# Altium PCB PCB2.PcbDoc
Units mm, origin at the board's own origin, x right, y up, seen from the top; angles counter-clockwise.
Board outline 67 x 30 mm, 2 copper layers (Top Layer, Bottom Layer); 26 components, 17 nets, 61 pads, 16 vias.
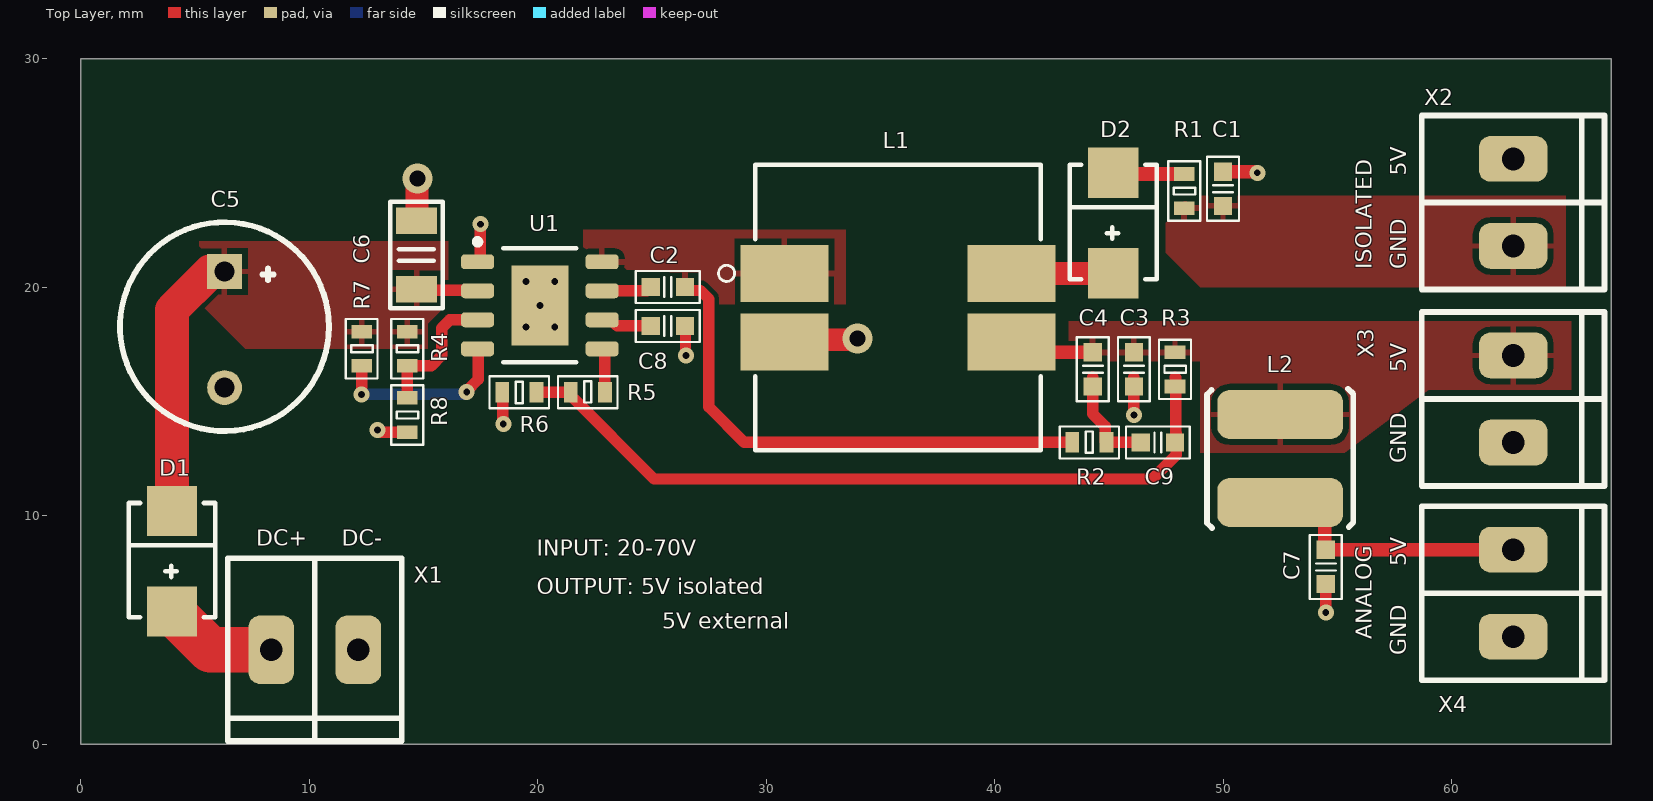
[diagram p0: Top Layer view]
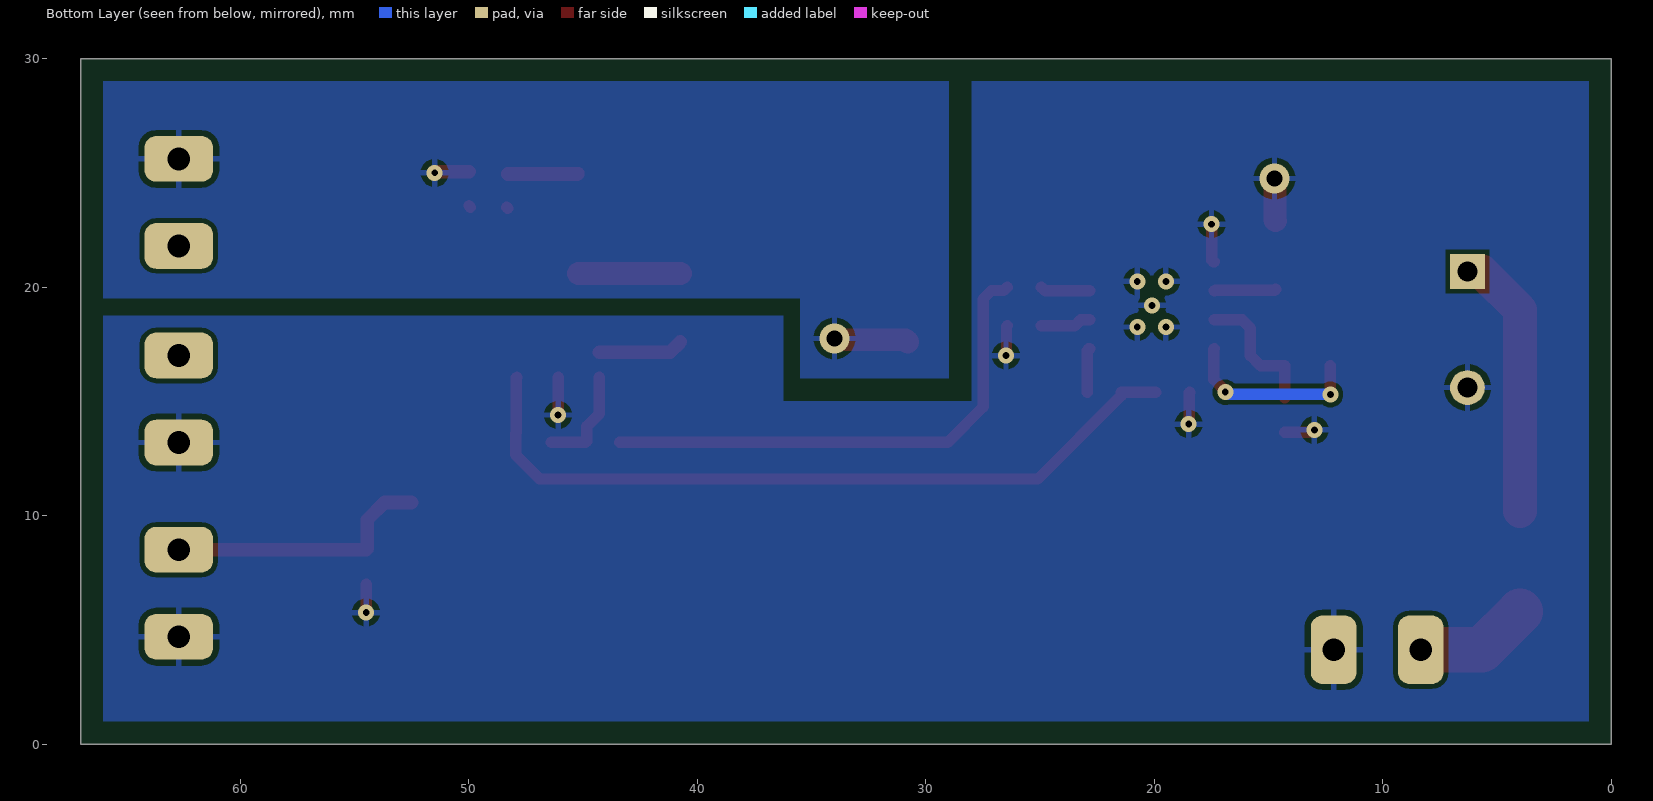
[diagram p1: Bottom Layer view, seen from below]
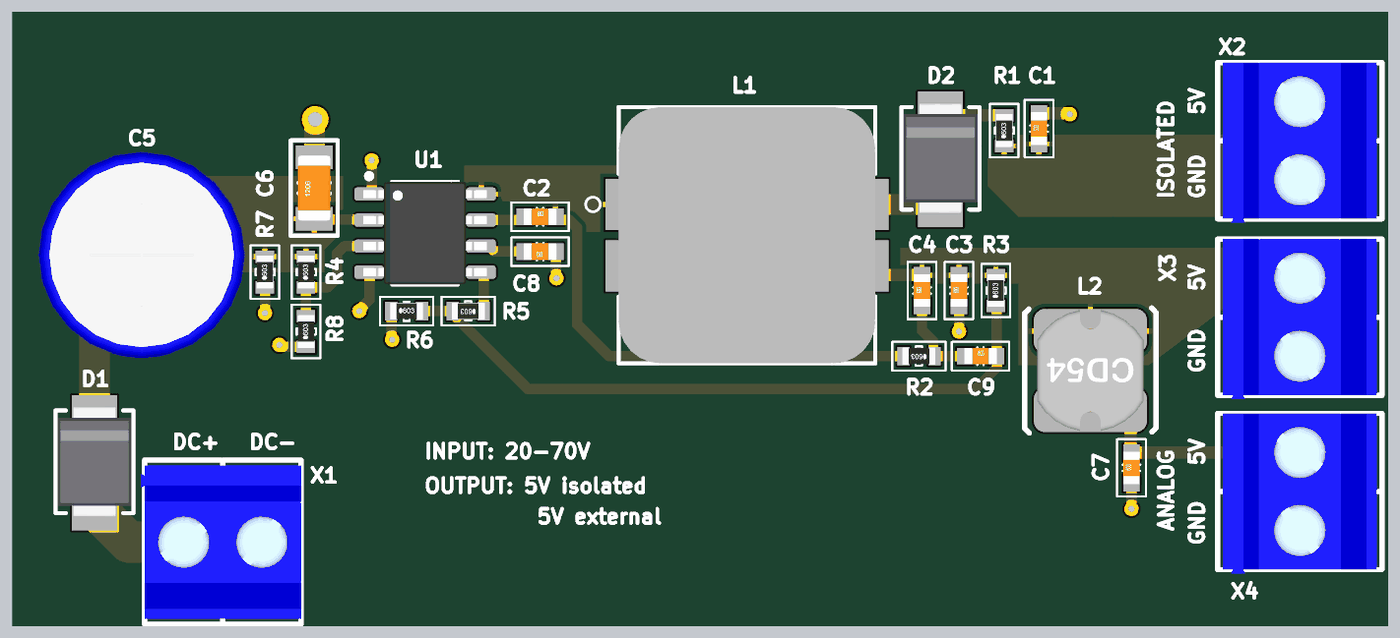
[diagram p2: 3D render of the assembled board from above, using the file's embedded part models]

## Layer stack, top to bottom
Top Solder: solder mask 0.0102, Solder Resist, Dk 3.5
Top Layer: signal copper 0.0356
Dielectric 1: dielectric 0.32, FR-4, Dk 4.8
Bottom Layer: signal copper 0.0356
Bottom Solder: solder mask 0.0102, Solder Resist, Dk 3.5

## Board outline
0,0 0,30 67,30 67,0

## Design rules (kind name [scope] priority, off if disabled: settings)
Clearance [All] p1: gap=0.2 ignorepadtopadclearanceinfootprint=FALSE except(0: SMDPad-Hole THPad-Hole Via-Hole Fill-Hole Poly-Hole Region-Hole Text-Hole)
HoleSize [All] p1: absolutevalues=TRUE maxlimit=3 minlimit=0.025 maxpercent=80.000 minpercent=20.000
HoleToHoleClearance [All] p1: gap=0.2 allowstackedmicrovias=TRUE
MinimumSolderMaskSliver [All] p1: minsoldermaskwidth=0.2
PolygonConnect [All] p1: connectstyle=Relief reliefconductorwidth=0.254 reliefentries=4 polygonreliefangle="90 Angle" airgapwidth=0.254
RoutingVias [All] p1: holewidth=0.3 width=0.7 viastyle="Through Hole" minholewidth=0.3 minwidth=0.7 maxholewidth=0.7 maxwidth=1.3
SilkToSilkClearance [All] p1: silktosilkclearance=0.2
SilkToSolderMaskClearance [IsPad] p1: minsilkscreentomaskgap=0.1 clearancetoexposedcopper=TRUE
SolderMaskExpansion [All] p1: expansion=0.102 istentingtop=FALSE
Width [All] p1: maxlimit=4 minlimit=0.2 preferedwidth=0.5 minimp=50.000000 maximp=50.000000 favimp=50.000000
25 further rules are at their usual default settings.

## Components (designator, comment, footprint, x,y, rotation, side; value= is the part's Value field where it differs from the comment)
C1 "22uF" C_0603 50,24.3 r90 top
C2 "0.1uF" C_0603 25.7,20 r0 top
C3 "22uF" C_0603 46.1,16.4 r90 top
C4 "3.3nF" C_0603 44.3,16.4 r90 top
C5 "10uF" CAP470X25V 6.3,18.14 r270 top
C6 "0.1uF" C_1206 14.7,21.4 r90 top
C7 "{Value}" C_0603 54.5,7.75 r90 top
C8 "2.2uF" C_0603 25.7,18.3 r180 top
C9 "1nF" C_0603 47.15,13.2 r0 top
D1 "10BQ100" DO-214AA 4,8 r270 top
D2 "10BQ100" DO-214AA 45.2,22.8 r270 top
L1 "DRQ127-330-R" XFMR_DRQ127-150-R 35.775,19.1 r0 top
L2 "{Value}" CD54NP 52.5,12.5 r180 top
R1 "0R" R_0603 48.3,24.2 r90 top
R2 "100k" R_0603 44.15,13.2 r180 top
R3 "95k3" R_0603 47.9,16.4 r90 top
R4 "75k" R_0603 14.3,17.3 r90 top
R5 "4k7" R_0603 22.2,15.4 r180 top
R6 "30k" R_0603 19.2,15.4 r0 top
R7 "165k" R_0603 12.3,17.3 r90 top
R8 "6k8" R_0603 14.3,14.4 r90 top
U1 "SCT2A22STER" ESOP-8 20.1,19.2 r0 top
X1 "DG340R-3.81-02P" 340-021-12 10.25,4.127 r0 top
X2 "DG340R-3.81-02P" 340-021-12 62.7,23.705 r90 top
X3 "DG340R-3.81-02P" 340-021-12 62.7,15.1 r90 top
X4 "DG340R-3.81-02P" 340-021-12 62.7,6.6 r90 top

## Footprints (in the part's own frame and the unit in brackets; to place one, negate y for a bottom-side part, rotate by r counter-clockwise, add the part's x,y. Pads: shape width x height; smd on the part's side, far side on the other; paste and mask are expansions set on the pad)
340-021-12 [mm]
  rrect50% 2x3 hole 1: 1(1.905,0) 2(-1.905,0)
  silkscreen extent -3.81,-4 3.81,4, body extent -4,-3.75 3.81,3.75, height 8.5
C_0603 [mm] "Chip Capacitor; Body 1.6 x 0.8 mm (LxW typ)"
  rect 0.8x0.8 smd: 1(-0.75,0) 2(0.75,0)
  silkscreen extent -1.4,-0.7 1.4,0.7, body extent -0.8,-0.4 0.8,0.4, height 0.3
C_1206 [mm]
  rect 1.15x1.8 smd: 1(-1.5,0) 2(1.5,0)
  silkscreen extent -2.32,-1.15 2.33,1.15, body extent -1.6,-0.8 1.6,0.8, height 1
CAP470X25V [mil]
  round 60 hole 35: 1(100,0)
  rect 60x60 hole 35: 2(-100,0)
  silkscreen extent -185,-180 175,180, body extent -198,-198 198,198, height 513
CD54NP [mm] "inductor"
  rrect50% 5.5x2.15 smd mask+0.102: 1(0,1.925) 2(0,-1.925)
  silkscreen extent -3.2,-3.05 3.2,3.05, body extent -2.6,-2.96 2.6,2.96, height 4.5
DO-214AA [mm]
  rect 2.2x2.2 smd: 1(2.2,0) 2(-2.2,0)
  silkscreen extent -2.55,-1.9 2.45,1.9, body extent -2.75,-1.8 2.65,1.8, height 2.3
ESOP-8 [mm] "with thermal pad"
  rrect50% 1.45x0.65 smd: 1(-2.725,1.905) 2(-2.725,0.635) 3(-2.725,-0.635) 4(-2.725,-1.905) 5(2.725,-1.905) 6(2.725,-0.635) 7(2.725,0.635) 8(2.725,1.905)
  rect 2.5x3.5 smd: 9(0,0)
  silkscreen extent -2.85,-2.5 1.6,2.9, body extent -3,-2.5 3,2.5, height 1.55
R_0603 [mm]
  rect 0.6x0.9 smd: 1(-0.75,0) 2(0.75,0)
  silkscreen extent -1.3,-0.7 1.3,0.7, body extent -0.8,-0.41 0.8,0.41, height 0.45
XFMR_DRQ127-150-R [mm]
  rect 3.85x2.5 smd: 1(-4.975,1.5) 2(-4.975,-1.5) 3(4.975,-1.5) 4(4.975,1.5)
  silkscreen extent -7.85,-6.25 6.25,6.25, body extent -6.25,-6.25 6.25,6.25, height 8

## Part data
C1 C3: library part C0603, "Capacitor", Part Number=CC0603MRX5R6BB226, Alternative Part=CC0603MRX6S5BB226
C2: library part C0603, "Capacitor", Part Number=CC0603KRX7R9BB104, Alternative Part=CC0603MRY5V9BB104
C4: library part C0603, "Capacitor", Part Number=CC0603KRX7R9BB332, Alternative Part=CC0603JRX7R9BB332
C5: library part C_10_12_5mm, "Capacitor", Part Number=SH160M0010B5S-1012, Alternative Part=-
C6: library part C1206, "Capacitor", Part Number=CC1206KKX7R0BB104, Alternative Part=CC1206JKX7R0BB104
C7: library part C0603, "Capacitor", Part Number=-, Alternative Part=-
C8: library part C0603, "Capacitor", Part Number=CC0603KRX5R8BB225, Alternative Part=-
C9: library part C0603, "Capacitor", Part Number=CC0603KRX7R9BB102, Alternative Part=CC0603KRX7R8BB102
D1 D2: library part D_DO-214AA, "Diode", Alternative Part=VS-10BQ100, Part Number=10BQ100
L1: library part DRQ127-150-R, "Inductor Power Shielded", Package=None, Alternative Part=-, Availability=Unavailable, Part Number=DRQ127-330-R, Price=None
L2: library part L_CD54NP, "Inductor", Part Number=-, Alternative Part=-
R1: library part R0603, "Resistor", Part Number=RC0603JR-070RL, Alternative Part=RC0603JR-100RL
R2: library part R0603, "Resistor", Part Number=RC0603FR-07100KL, Alternative Part=RC0603JR-07100KL
R3: library part R0603, "Resistor", Part Number=RC0603FR-0795K3L, Alternative Part=-
R4: library part R0603, "Resistor", Part Number=RC0603JR-0775KL, Alternative Part=RC0603FR-0775KL
R5: library part R0603, "Resistor", Part Number=RC0603FR-074K7L, Alternative Part=RC0603JR-074K7L
R6: library part R0603, "Resistor", Part Number=RC0603FR-0730KL, Alternative Part=RC0603JR-0730KL
R7: library part R0603, "Resistor", Part Number=RC0603FR-07165KL, Alternative Part=-
R8: library part R0603, "Resistor", Part Number=RC0603FR-076K8L, Alternative Part=RC0603JR-076K8L
U1: "Buck dc/dc", Alternative Part=-, Part Number=SCT2A22STER
X1 X2 X3 X4: "Connectors", Alternative Part=KLS2-340-3.81-02P-2S, Part Number=DG340R-3.81-02P, Type=DG340R-3.81-02P

## Via types
v1: diameter 0.7, hole 0.3, Top Layer to Bottom Layer, 14 vias
v2: diameter 1.3, hole 0.7, Top Layer to Bottom Layer, 2 vias

## Nets (pads, with @x,y where several pads share a name; then routed paths per layer and width w, separated by ;. In a path a pad name is that pad's centre, name@x,y a point inside that pad or via, vN(x,y) a via of type N, cw(c..) or ccw(c..) an arc to the next point about the centre after c; other vN are vias at no path point)
GND: C1.2 L1.2 X2.1 | length 4.8
  Top Layer w0.6: C1.2 51.423,25.05 51.473,25 v1(51.5,25)
  Top Layer w1: L1.2 30.893,17.693 33.943,17.693 v2(34,17.75)
GND2: C3.1 C5.1 C6.2 C7.1 C8.1 R6.1 R8.1 U1.1 U1.9 X1.1 X3.2 X4.2 | length 10.6
  Top Layer w0.5: v1(13,13.75) 13.054,13.75 13.154,13.65 R8.1 ; U1.1 17.425,21.105 17.5,21.18 v1(17.5,22.75) ; R6.1 18.475,15.375 18.475,14.025 v1(18.5,14) ; C8.1 26.475,18.275 26.475,17.025 v1(26.5,17) ; v1(46.1,14.4) C3.1@46.1,16.05 ; v1(54.5,5.75) C7.1
  Top Layer w1: C6.2 14.725,22.925 14.725,24.725 v2(14.75,24.75)
  other v1: 19.5,18.25 20.75,18.25 20.1,19.2 19.5,20.25 20.75,20.25
NetC2_1: C2.1 U1.7 | length 2.2
  Top Layer w0.5: U1.7 24.785,19.835 C2.1
NetC2_2: C2.2 L1.1 R2.2 U1.8 | length 22.5
  Top Layer w0.5: C2.2 26.6,19.85 27.127,19.85 27.5,19.477 27.5,14.75 29.05,13.2 R2.2
NetC4_1: C4.1 C9.1 R2.1 | length 4.6
  Top Layer w0.5: C4.1@44.3,16.05 44.3,14.45 44.85,13.9 44.85,13.25 R2.1 C9.1
NetC8_2: C8.2 U1.6 | length 2.2
  Top Layer w0.5: U1.6 23.225,18.565 23.49,18.3 C8.2
NetC9_2: C9.2 R3.1 R5.2 R6.2 | length 33.5
  Top Layer w0.5: R6.2 R5.2 21.45,15.25 25.1,11.6 46.9,11.6 47.95,12.65 47.95,13.6 47.925,13.625 47.925,16.025 47.9,16.05
NetD1_1: D1.1 X1.2 | length 5
  Top Layer w2: D1.1 5.673,4.127 X1.2
NetD2_1: D2.1 L1.4 | length 4.5
  Top Layer w1: L1.4 D2.1
NetD2_2: D2.2 R1.2 | length 3.1
  Top Layer w0.5: D2.2 D2.2@45.25,24.95
  Top Layer w0.6: D2.2@45.25,24.95 R1.2
NetR4_1: R4.1 R8.2 U1.3 | length 6
  Top Layer w0.5: R8.2 R4.1 15.35,16.55 15.8,17 15.8,18.2 16.165,18.565 U1.3
NetR5_1: R5.1 U1.5 | length 2
  Top Layer w0.5: U1.5 22.875,17.295 22.95,17.22 R5.1
NetR7_1: R7.1 U1.4 | length 8
  Top Layer w0.5: v1(12.3,15.3) R7.1 ; v1(16.9,15.4) 16.9,15.454 17.4,15.954 17.4,17.27 U1.4
  Bottom Layer w0.5: v1(12.3,15.3) 16.746,15.3 16.846,15.4 v1(16.9,15.4)
VCC: C5.2 C6.1 D1.2 R4.2 R7.2 U1.2 | length 14.5
  Top Layer w0.5: C6.1 14.733,19.867 17.343,19.867 U1.2
  Top Layer w1.5: D1.2 4,19 5.668,20.668 6.288,20.668 C5.2
VCC5V: C1.1 R1.1 X2.2 | length 0.1
  Top Layer w0.5: R1.1 R1.1@48.35,23.5 ; C1.1@49.95,23.5 C1.1
VCC5V_EXT: C3.2 C4.2 L1.3 L2.2 R3.2 X3.1 | length 3.7
  Top Layer w0.6: L1.3 41.2,17.15 C4.2
VCC5V_EXT_ANALOG: C7.2 L2.1 X4.1 | length 11.8
  Top Layer w0.6: L2.1 53.699,10.575 54.456,9.818 54.456,8.544 C7.2 54.502,8.503 62.697,8.503 X4.1

## Polygon pours and split planes (outlines as drawn)
NetC2_2 on Top Layer "NETC2_2_L01_P010" (solid, pour order 10): 33.5,22.5 33.5,19.25 25.75,19.25 25.75,20.75 22,20.75 22,22.5
VCC5V_EXT on Top Layer "VCC5V_EXT_L01_P009" (solid, pour order 9): 65.25,18.5 65.25,15.5 59,15.5 55.333,12.75 49,12.75 49,16.75 43.25,16.75 43.25,18.5
VCC5V on Top Layer "VCC5V_L01_P008" (solid, pour order 8): 51.25,24 47.5,24 47.5,21.5 49,20 65,20 65,24
VCC on Top Layer "VCC_L01_P006" (solid, pour order 6): 5.2,22 16.1,22 16.1,19.3 15.2,18.4 15.2,17.3 7.2,17.3 5.2,19.3
GND2 on Bottom Layer "GND2_L02_P000" (solid, pour order 0): 1,1 1,29 28,29 28,15 36.25,15 36.25,18.75 66,18.75 66,1
GND on Bottom Layer "GND_L02_P007" (solid, pour order 7): 29,29 66,29 66,19.5 35.5,19.5 35.5,16 29,16

## Silkscreen, mask and mechanical layers (free items; w line width, h text height)
Top Overlay:
  text "5V" at 58.02,24.88 h0.7 r90
  text "ISOLATED" at 56.52,20.78 h0.7 r90
  text "GND" at 58.02,20.78 h0.7 r90
  text "5V" at 58.02,16.28 h0.7 r90
  text "GND" at 58.02,12.28 h0.7 r90
  text "DC+" at 7.68,8.68 h0.7
  text "DC-" at 11.43,8.68 h0.7
  text "INPUT: 20-70V" at 19.974,8.231 h0.7
  text "5V" at 58.02,7.78 h0.7 r90
  text "OUTPUT: 5V isolated" at 19.974,6.547 h0.7
  text "5V external" at 25.455,5.047 h0.7
  text "ANALOG" at 56.52,4.58 h0.7 r90
  text "GND" at 58.02,3.88 h0.7 r90
Mechanical 1:
  the board outline again, w0.254